# EAGLE board imu-adapter-node5 (EAGLE 6.2)
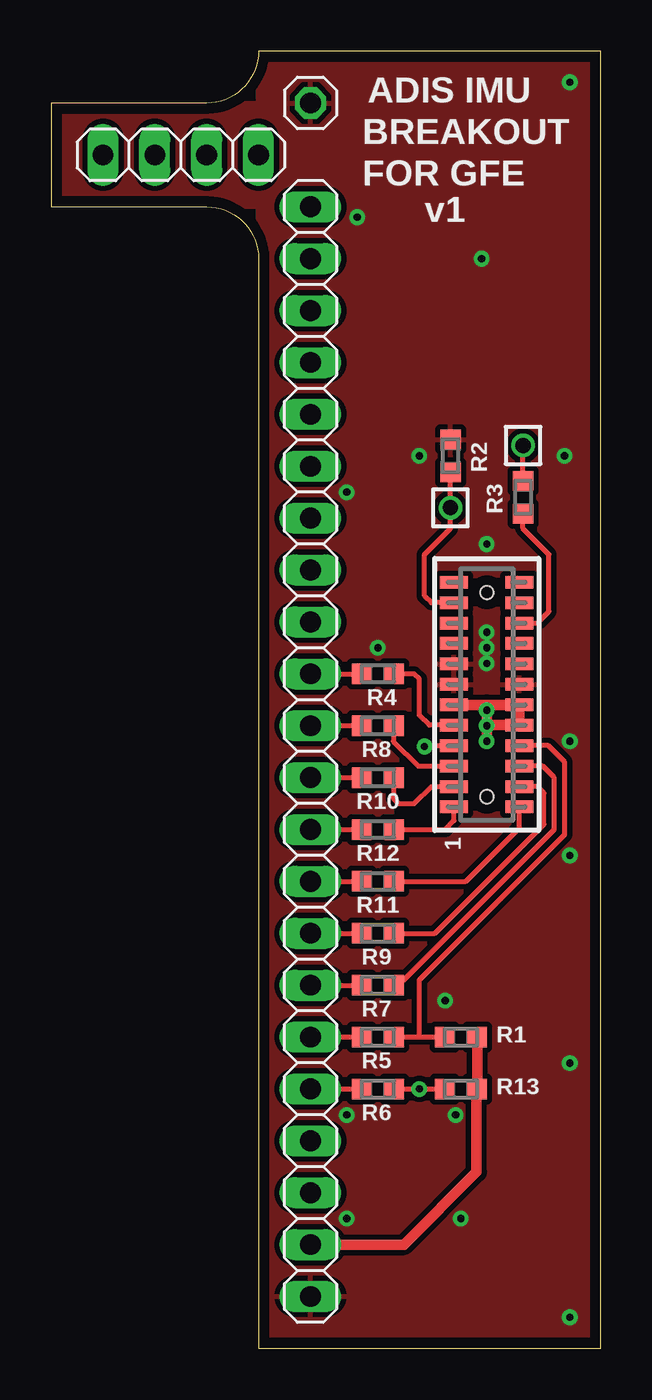
[diagram p0: board, top side]
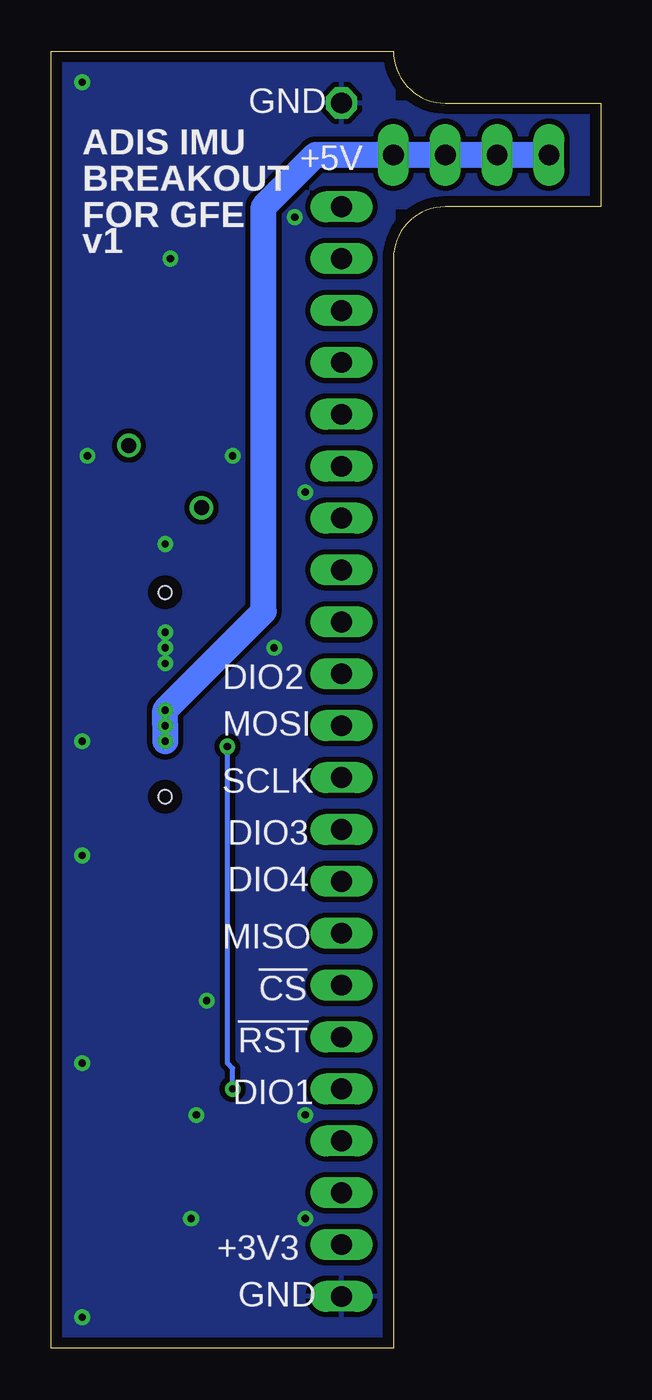
[diagram p1: board, bottom side, seen from below]

Size 26.92 x 63.5 mm. Coordinates in mm from the lower left corner, seen from the top.
Outline: 10.16,0 26.92,0 26.92,63.5 10.16,63.5 arc-90 7.62,60.96 0,60.96 0,55.88 7.62,55.88 arc-90 10.16,53.34 10.16,0
Copper layers (1*16): Top 0.0178mm / dielectric 59mil / Bottom 0.0178mm
Design rules: minimum track width 6mil, minimum drill 14mil, track to track 6mil, track to pad 6mil, pad to pad 6mil, via to via 6mil, smd to smd 6mil, copper to edge 20mil, drill to drill 16mil, minimum pad ring 8mil, minimum via ring 8mil, stop-mask expansion 3mil, vias tented up to drill 0mil, thermal gap 10mil

## Footprints (pad centres in the part's own frame; a part is rotated, then mirrored left to right if it is on the bottom)
CLM-112-02-XX-D-A = smd 0.61 x 1.37: 1 -5.5,1.6; 2 -5.5,-1.6; 3 -4.5,1.6; 4 -4.5,-1.6; 5 -3.5,1.6; 6 -3.5,-1.6; 7 -2.5,1.6; 8 -2.5,-1.6; 9 -1.5,1.6; 10 -1.5,-1.6; 11 -0.5,1.6; 12 -0.5,-1.6; 13 0.5,1.6; 14 0.5,-1.6; 15 1.5,1.6; 16 1.5,-1.6; 17 2.5,1.6; 18 2.5,-1.6; 19 3.5,1.6; 20 3.5,-1.6; 21 4.5,1.6; 22 4.5,-1.6; 23 5.5,1.6; 24 5.5,-1.6 | hole 0.635: -5,0; 5,0
1X22 = drill 1.016 long: 1 -26.67,0; 2 -24.13,0; 3 -21.59,0; 4 -19.05,0; 5 -16.51,0; 6 -13.97,0; 7 -11.43,0; 8 -8.89,0; 9 -6.35,0; 10 -3.81,0; 11 -1.27,0; 12 1.27,0; 13 3.81,0; 14 6.35,0; 15 8.89,0; 16 11.43,0; 17 13.97,0; 18 16.51,0; 19 19.05,0; 20 21.59,0; 21 24.13,0; 22 26.67,0
1X04 = drill 1.016 long: 1 -3.81,0; 2 -1.27,0; 3 1.27,0; 4 3.81,0
1X01 = drill 1.016 octagon: 1 0,0
0603-B-NOSILK = smd 0.95 x 1: 1 -0.8,0; 2 0.8,0
2MM-TEST-POINT = drill 0.737: 1 0,0

## Placement (x,y rotation side)
J1  CLM-112-02  [CLM-112-02-XX-D-A]  21.34,32 90 top
JP1  [1X22]  12.7,29.21 270 top
JP2  [1X04]  6.35,58.42 0 top
JP3  [1X01]  12.7,60.96 0 top
R1  10k  [0603-B-NOSILK]  20.07,15.24 180 top
R2  1k  [0603-B-NOSILK]  19.56,43.69 90 top
R3  1k  [0603-B-NOSILK]  23.11,41.66 90 top
R4  1k  [0603-B-NOSILK]  16,33.02 180 top
R5  1k  [0603-B-NOSILK]  16,15.24 180 top
R6  1k  [0603-B-NOSILK]  16,12.7 180 top
R7  1k  [0603-B-NOSILK]  16,17.78 180 top
R8  1k  [0603-B-NOSILK]  16,30.48 180 top
R9  1k  [0603-B-NOSILK]  16,20.32 180 top
R10  1k  [0603-B-NOSILK]  16,27.94 180 top
R11  1k  [0603-B-NOSILK]  16,22.86 180 top
R12  1k  [0603-B-NOSILK]  16,25.4 180 top
R13  10k  [0603-B-NOSILK]  20.07,12.7 180 top
TP1  TEST-POINT  [2MM-TEST-POINT]  23.11,44.2 0 top
TP2  TEST-POINT  [2MM-TEST-POINT]  19.56,41.15 0 top

## Library data of the parts
J1 = samtec-clm-112-02
JP1-JP3 = pinhead
R1-R13 = rcl_custom
TP1 TP2 = Tova

## Nets
!CS: J1.6 R7.1
!RST: J1.8 R1.2 R5.1
+3V3: JP1.21 R1.1 R13.1
+5V: J1.10 J1.11 J1.12 JP2.1 JP2.2 JP2.3 JP2.4
AUX_ADC: J1.21 R2.1 TP2.1
AUX_DAC: J1.20 R3.1
DIN: J1.5 R8.1
DIO1: J1.7 R6.1 R13.2
DIO2: J1.9 R4.1
DIO3: J1.1 R12.1
DIO4/CLKIN: J1.2 R11.1
DNC1: J1.16
DNC2: J1.17
DNC3: J1.18
DNC4: J1.19
DNC5: J1.22
DNC6: J1.23
DNC7: J1.24
DOUT: J1.4 R9.1
GND: J1.13 J1.14 J1.15 JP1.22 JP3.1 R2.2
LPC-!EINT0: JP1.18 R6.2
LPC-!EINT1: JP1.10 R4.2
LPC-!RST: JP1.17 R5.2
LPC-DIO3: JP1.13 R12.2
LPC-DIO4: JP1.14 R11.2
LPC-MISO: JP1.15 R9.2
LPC-MOSI: JP1.11 R8.2
LPC-SCLK: JP1.12 R10.2
LPC-SSEL: JP1.16 R7.2
N$1: R3.2 TP1.1
SCLK: J1.3 R10.1

## Tracks (layer width: path | path; a pad name or v marks a point on that pad's centre or on a via)
!CS
  Top 0.254: J1.6 24.07,28.5 24.64,27.94 24.64,25.4 17.27,18.03 R7.1
!RST
  Top 0.254: J1.8 24.34,29.5 25.15,28.7 25.15,25.15 18.03,18.03 18.03,15.24 | 17.02,15.49 R5.1 18.03,15.24 | 18.03,15.24 R1.2
+3V3
  Top 0.508: JP1.21 17.27,5.08 20.83,8.64 20.83,12.66 R13.1 R1.1
+5V  (via drill 0.36)
  Top 0.508: v21.34,30.48 21.34,31.5 J1.11 J1.12 J1.10 21.36,30.5 v21.34,30.48 | v21.34,30.48 v21.34,29.72
  Bottom 0.508: JP2.2 4.83,58.42
  Bottom 1.27: JP2.1 JP2.2 JP2.3 JP2.4 13.97,58.42 16.51,55.88 16.51,36.07 v21.34,31.24 v21.34,30.48 v21.34,29.72
AUX_ADC
  Top 0.254: J1.21 18.61,36.5 18.29,36.83 18.29,38.86 19.56,40.13 TP2.1 R2.1
AUX_DAC
  Top 0.254: J1.20 23.82,35.5 24.38,36.07 24.38,38.86 23.11,40.13 R3.1
DIN
  Top 0.254: J1.5 17.98,28.5 16.76,29.72 16.76,30.44 R8.1
DIO1  (via drill 0.36)
  Top 0.254: J1.7 18.33,29.5 v18.29,29.46 | R6.1 v18.03,12.7 R13.2
  Bottom 0.254: v18.29,29.46 18.29,13.97 18.03,13.72 v18.03,12.7
DIO2
  Top 0.254: J1.9 18.52,30.5 18.03,30.99 18.03,32.77 17.78,33.02 R4.1
DIO3
  Top 0.254: R12.1 16.76,25.4 16.51,25.15 16.55,25.15 R12.1 | J1.1 19.74,25.83 19.3,25.4 R12.1
DIO4/CLKIN
  Top 0.254: J1.2 22.94,25.48 20.32,22.86 R11.1
DOUT
  Top 0.254: J1.4 23.8,27.5 24.13,27.18 24.13,25.65 18.8,20.32 R9.1
GND  (via drill 0.36)
  other vias: 25.4,1.52 25.4,61.98 16,34.29 21.34,39.37 18.03,43.69 25.15,43.69 25.4,29.72 21.34,35.05 21.34,34.29 21.34,33.53 25.4,24.13 19.81,11.43 14.48,11.43 14.48,6.35 20.07,6.35 19.3,17.02 25.4,13.97 21.08,53.34 14.99,55.37 14.48,41.91
  pour Bottom (isolate 0.254): 10.16,0 10.16,55.88 0,55.88 0,60.96 10.16,60.96 10.16,63.5 26.92,63.5 26.92,0
  pour Top (isolate 0.254): 10.16,0 10.16,55.88 0,55.88 0,60.96 10.16,60.96 10.16,63.5 26.92,63.5 26.92,0
LPC-!EINT0
  Top 0.254: JP1.18 R6.2
LPC-!EINT1
  Top 0.254: JP1.10 R4.2
LPC-!RST
  Top 0.254: JP1.17 R5.2
LPC-DIO3
  Top 0.254: JP1.13 R12.2
LPC-DIO4
  Top 0.254: JP1.14 R11.2
LPC-MISO
  Top 0.254: JP1.15 R9.2
LPC-MOSI
  Top 0.254: JP1.11 R8.2
LPC-SCLK
  Top 0.254: JP1.12 R10.2
LPC-SSEL
  Top 0.254: JP1.16 R7.2
N$1
  Top 0.254: R3.2 TP1.1
SCLK
  Top 0.254: J1.3 18.61,27.5 17.78,26.67 17.02,26.67 16.76,26.92 16.76,27.9 R10.1

## Text on the board
tPlace: ADIS IMU | BREAKOUT | FOR GFE | v1
bPlace: GND | +5V | ADIS IMU | BREAKOUT | FOR GFE | v1 | DIO2 | MOSI | SCLK | DIO3 | DIO4 | MISO | !CS | !RST | DIO1 | +3V3 | GND
Document: GND | +5V | LPC-!EINT1 | DIO2 | LPC-MOSI | DIN | LPC-SCLK | SCLK | DIO3 | LPC-DIO3 | LPC-DIO4 | DIO4/CLKIN | LPC-MISO | DOUT | LPC-SSEL | !CS | LPC-!RST | !RST | LPC-!EINT0 | DIO1 | +3V3 | GND